# Altium PCB ServoBoard.PcbDoc
Units mm, origin at the board's own origin, x right, y up, seen from the top; angles counter-clockwise.
Board outline 59 x 59 mm, 2 copper layers (Top Layer, Bottom Layer), stack 1.571 mm thick; 29 components, 40 nets, 144 pads, 14 vias.
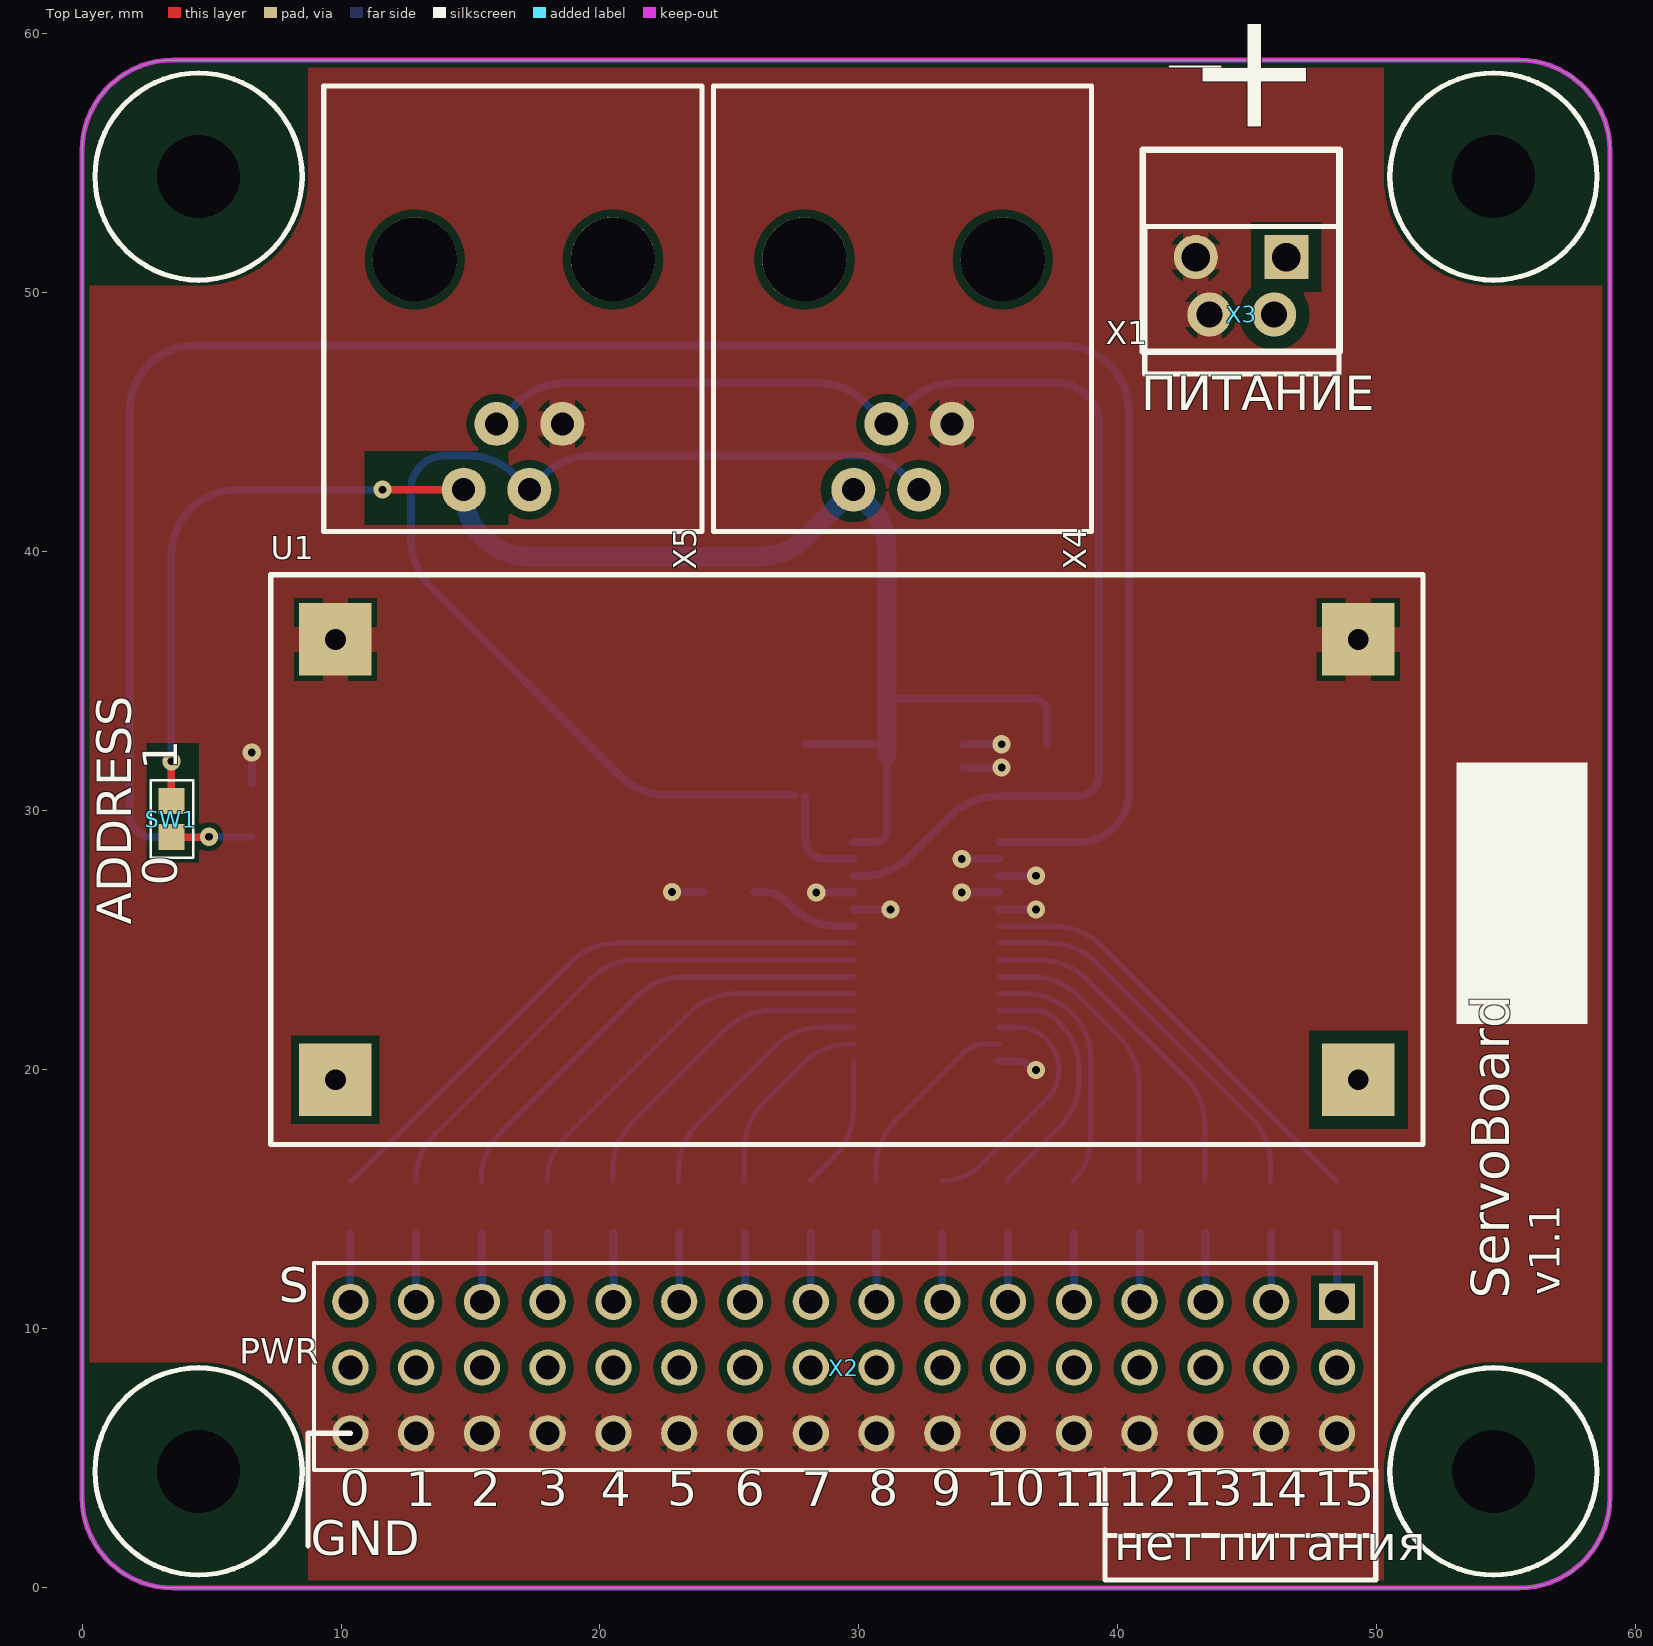
[diagram p0: Top Layer view]
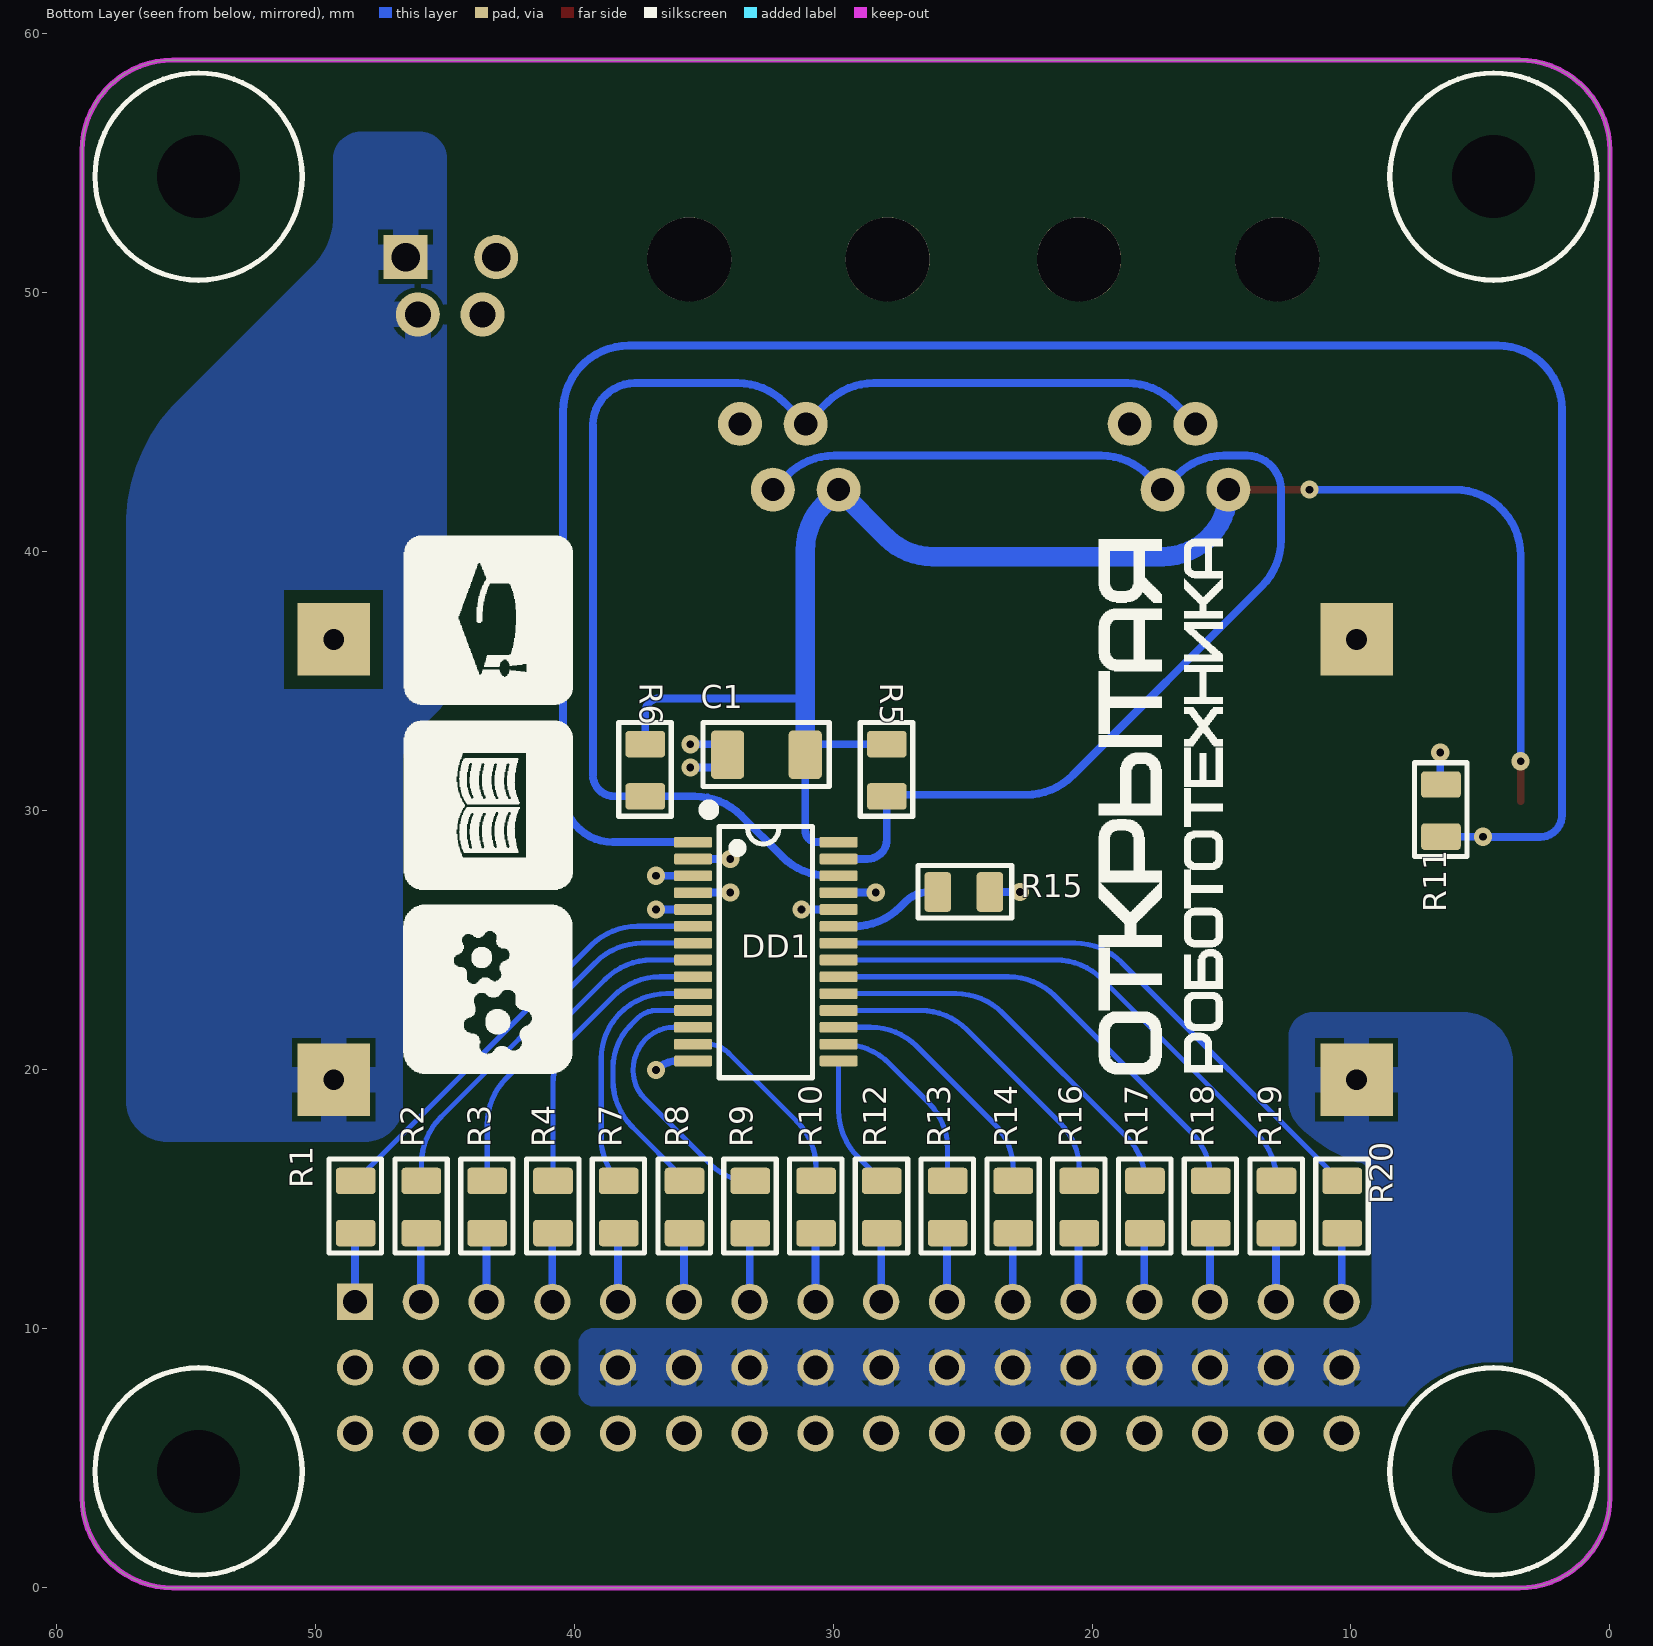
[diagram p1: Bottom Layer view, seen from below]

## Layer stack, top to bottom
Top Solder: solder mask 0.0102, Solder Resist, Dk 3.5
Top Layer: signal copper 0.0356
Dielectric 1: dielectric 1.5, FR-4, Dk 4.8
Bottom Layer: signal copper 0.0356
Bottom Solder: solder mask 0.0102, Solder Resist, Dk 3.5

## Board outline
0,3.475 0,55.475 cw(c3.5,55.475) 3.5,58.975 55.5,58.975 cw(c55.5,55.475) 59,55.475 59,3.475 cw(c55.5,3.475) 55.5,-0.025 3.5,-0.025 cw(c3.5,3.475)

## Design rules (kind name [scope] priority, off if disabled: settings)
Clearance Clearance_POWER_12B [InNet('12B') vs InNet('GND')] p1: gap=0.5 except(0.2: Arc-SMDPad Arc-Via Track-SMDPad Track-Via SMDPad-SMDPad SMDPad-Via)
Clearance Clearance_POWER_12B_1 [InNet('NetVT1_2') vs InNet('GND')] p2: gap=0.5
Clearance Clearance_POWER_12B_2 [InNet('NetC1_1') vs InNet('GND')] p3: gap=0.5
Clearance Clearance_POWER_5B [InNet('5B') vs InNet('GND')] p4: gap=0.3 except(0.2: SMDPad-SMDPad; 0.4: Arc-THPad Track-THPad THPad-THPad THPad-Fill THPad-Poly THPad-Region; 0.5: Arc-Fill Arc-Poly Arc-Region Track-Fill Track-Poly Track-Region)
Clearance [All] p5: gap=0.2 except(0.3: Arc-THPad Track-THPad THPad-THPad THPad-Via THPad-Fill THPad-Poly THPad-Region THPad-Text)
ComponentClearance [All] p1: gap=0.05 collisioncheckmode=3 verticalgap=0.05 showdistances=FALSE
HoleSize [All] p1: absolutevalues=TRUE maxlimit=5 minlimit=0.2 maxpercent=80.000 minpercent=20.000
HoleToHoleClearance [All] p1: gap=0 allowstackedmicrovias=TRUE
MinimumSolderMaskSliver [All] p1: minsoldermaskwidth=0.05
PolygonConnect NetTieDirect [InComponentClass('NetTieDirect')] p1: connectstyle=Direct reliefconductorwidth=0.254 reliefentries=4 polygonreliefangle="90 Angle" airgapwidth=0.254
PolygonConnect NetTieRelief [InComponentClass('NetTieRelief')] p2: connectstyle=Direct reliefconductorwidth=0.6 reliefentries=4 polygonreliefangle="90 Angle" airgapwidth=0.2
PolygonConnect PolygonConnect_GND_2 [HasFootprint('XT60-M') And OnLayer('Bottom Layer') vs InNet('GND')] p3: connectstyle=Relief reliefconductorwidth=4 reliefentries=4 polygonreliefangle="90 Angle" airgapwidth=0.254
PolygonConnect PolygonConnect_GND [InNet('GND')] p4: connectstyle=Relief reliefconductorwidth=1 reliefentries=4 polygonreliefangle="90 Angle" airgapwidth=0.2
PolygonConnect PolygonConnect_GND_12B [InNet('NetVT1_2')] p5: connectstyle=Relief reliefconductorwidth=4 reliefentries=4 polygonreliefangle="90 Angle" airgapwidth=0.2
PolygonConnect PolygonConnect_GND_12B_3 [InNet('6B_Servo')] p6: connectstyle=Relief reliefconductorwidth=1 reliefentries=4 polygonreliefangle="90 Angle" airgapwidth=0.2
PolygonConnect PolygonConnect_GND_12B_2 [InNet('NetC1_1')] p7: connectstyle=Relief reliefconductorwidth=1 reliefentries=4 polygonreliefangle="90 Angle" airgapwidth=0.2
PolygonConnect PolygonConnect_GND_12B_1 [InNet('12B')] p8: connectstyle=Relief reliefconductorwidth=1 reliefentries=4 polygonreliefangle="90 Angle" airgapwidth=0.2
PolygonConnect PolygonConnect_GND_1 [HasFootprint('TERMINAL 3 way-3.5mm') vs InNet('GND')] p9: connectstyle=Direct reliefconductorwidth=0.6 reliefentries=4 polygonreliefangle="90 Angle" airgapwidth=0.2
PolygonConnect PolygonConnect_via [IsVia] p10: connectstyle=Direct reliefconductorwidth=0.6 reliefentries=4 polygonreliefangle="90 Angle" airgapwidth=0.2
PolygonConnect [All] p11: connectstyle=Relief reliefconductorwidth=0.6 reliefentries=4 polygonreliefangle="90 Angle" airgapwidth=0.2
RoutingVias [All] p1: holewidth=0.711 width=1.27 viastyle="Through Hole" minholewidth=0.711 minwidth=1.27 maxholewidth=0.711 maxwidth=1.27
SilkToSilkClearance [All] p1: silktosilkclearance=0
SilkToSolderMaskClearance [IsPad] p1: minsilkscreentomaskgap=0 clearancetoexposedcopper=TRUE
SolderMaskExpansion [All] p1: expansion=0.05
Width [All] p1: maxlimit=3 minlimit=0.2 preferedwidth=0.3
24 further rules are at their usual default settings.

## Components (designator, comment, footprint, x,y, rotation, side; value= is the part's Value field where it differs from the comment)
C1 "Capacitor" C1206 32.545,32.175 r180 bottom
DD1 "PCA9685PW" TSSOP28 32.695,24.55 r180 bottom
R1 "Resistor_0,125Вт" R0805 48.435,14.683 r90 bottom
R2 "Resistor_0,125Вт" R0805 45.895,14.683 r90 bottom
R3 "Resistor_0,125Вт" R0805 43.355,14.683 r90 bottom
R4 "Resistor_0,125Вт" R0805 40.815,14.683 r90 bottom
R5 "Resistor_0,125Вт" R0805 27.922,31.55 r90 bottom
R6 "Resistor_0,125Вт" R0805 37.25,31.55 r90 bottom
R7 "Resistor_0,125Вт" R0805 38.275,14.683 r90 bottom
R8 "Resistor_0,125Вт" R0805 35.735,14.683 r90 bottom
R9 "Resistor_0,125Вт" R0805 33.195,14.683 r90 bottom
R10 "Resistor_0,125Вт" R0805 30.655,14.683 r90 bottom
R11 "Resistor_0,125Вт" R0805 6.525,29.992 r90 bottom
R12 "Resistor_0,125Вт" R0805 28.115,14.683 r90 bottom
R13 "Resistor_0,125Вт" R0805 25.575,14.683 r90 bottom
R14 "Resistor_0,125Вт" R0805 23.035,14.683 r90 bottom
R15 "Resistor_0,125Вт" R0805 24.95,26.85 r180 bottom
R16 "Resistor_0,125Вт" R0805 20.495,14.683 r90 bottom
R17 "Resistor_0,125Вт" R0805 17.955,14.683 r90 bottom
R18 "Resistor_0,125Вт" R0805 15.415,14.683 r90 bottom
R19 "Resistor_0,125Вт" R0805 12.875,14.683 r90 bottom
R20 "Resistor_0,125Вт" R0805 10.335,14.683 r90 bottom
SW1 "DS1040-01" 1PAD_ADR 3.448,28.968 r90 top
U1 "Module LM2596" "MODULE LM2596" 29.535,28.1 r180 top
X1 "Header_2_trm" TERMINAL-2WAY-3.5MM 44.758,51.369 r180 top
X2 "Header_48_plg" PLS-48 29.435,8.475 r270 top
X3 "" CWF-2 44.76,49.6 r90 top
X4 "Header_4_sct" RJ11_4P4C_V 31.685,49.575 r0 top
X5 "Header_4_sct" RJ11_4P4C_V 16.635,49.575 r0 top

## Footprints (in the part's own frame and the unit in brackets; to place one, negate y for a bottom-side part, rotate by r counter-clockwise, add the part's x,y. Pads: shape width x height; smd on the part's side, far side on the other; paste and mask are expansions set on the pad)
1PAD_ADR [mm] "Перемычка для выбора адреса"
  rect 1x1 smd: 1(0,0) 2(1.4,0)
  silkscreen extent -0.8,-0.85 2.2,0.8
C1206 [mm]
  rrect25% 1.28x1.87 smd: 1(-1.528,-0.024) 2(1.472,-0.024)
  silkscreen extent -2.47,-1.25 2.4,1.22, body extent -1.6,-0.85 1.6,0.85, height 1.47
CWF-2 [mm]
  round 1.7 hole 1: 1(-0.45,-1.275) 2(-0.45,1.225)
  silkscreen extent -2.75,-3.78 2.95,3.73, body extent -2.7,-3.73 3,3.78, height 7.7
"MODULE LM2596" [mm]
  rect 2.8x2.8 hole 0.8: 1(-19.75,8.5) 2(-19.75,-8.5) 3(19.75,8.5) 4(19.75,-8.5)
  silkscreen extent -22.25,-11 22.25,11, body extent -21.75,-10.5 21.75,10.5, height 14.71
PLS-48 [mm]
  rect 1.4x1.4 hole 0.92: 1(-2.55,19.025)
  round 1.4 hole 0.92: 2(-0.01,19.025) 3(2.53,19.025) 4(-2.55,16.485) 5(-0.01,16.485) 6(2.53,16.485) 7(-2.55,13.945) 8(-0.01,13.945) 9(2.53,13.945) 11(-0.01,11.405) 12(2.53,11.405) 13(-2.55,8.865) 14(-0.01,8.865) 15(2.53,8.865) 16(-2.55,6.325) 17(-0.01,6.325) 18(2.53,6.325) 19(-2.55,3.785) 20(-0.01,3.785) 21(2.53,3.785) 22(-2.55,1.245) 23(-0.01,1.245) 24(2.53,1.245) 28(-2.55,-3.835) 29(-0.01,-3.835) 30(2.53,-3.835) 31(-2.55,-6.375) 32(-0.01,-6.375) 33(2.53,-6.375) 34(-2.55,-8.915) 35(-0.01,-8.915) 36(2.53,-8.915) 37(-2.55,-11.455) 38(-0.01,-11.455) 39(2.53,-11.455) 40(-2.55,-13.995) 41(-0.01,-13.995) 42(2.53,-13.995) 46(-2.55,-19.075) 47(-0.01,-19.075) 48(2.53,-19.075)
  round 1.4 hole 0.92 mask+0.102: 10(-2.55,11.405) 25(-2.55,-1.295) 26(-0.01,-1.295) 27(2.53,-1.295) 43(-2.55,-16.535) 44(-0.01,-16.535) 45(2.53,-16.535)
  silkscreen extent -4.05,-20.48 3.95,20.52, body extent -3.86,-20.33 3.76,20.31, height 8.54
R0805 [mm] "Chip Resistor, 2-Leads, Body 2,10x1,30mm, IPC Medium Density"
  rrect25% 1.02x1.53 smd paste-5: 1(-1.008,0) 2(1.008,0)
  silkscreen extent -1.78,-1 1.85,1.02, body extent -1.1,-0.7 1.1,0.7, height 0.55
RJ11_4P4C_V [mm]
  round 1.7 hole 0.89: 1(-0.63,-4.65) 2(-1.9,-7.19) 3(1.91,-4.65) 4(0.64,-7.19)
  round 3.25 hole 3.25 unplated: ""(-3.79,1.7) ""(3.865,1.7)
  silkscreen extent -7.3,-8.8 7.3,8.4, body extent -6.96,-8.43 7.01,8.07, height 15.94
TERMINAL-2WAY-3.5MM [mm]
  rect 1.7x1.7 hole 1.1: 1(-1.75,0)
  round 1.7 hole 1.1: 2(1.75,0)
  silkscreen extent -3.8,-4.15 3.8,3.65, body extent -3.56,-3.89 3.56,3.4, height 8.51
TSSOP28 [mm]
  rrect25% 1.47x0.41 smd: 1(-2.71,4.225) 2(-2.71,3.575) 3(-2.71,2.925) 4(-2.71,2.275) 5(-2.71,1.625) 6(-2.71,0.975) 7(-2.71,0.325) 8(-2.71,-0.325) 9(-2.71,-0.975) 10(-2.71,-1.625) 11(-2.71,-2.275) 12(-2.71,-2.925) 13(-2.71,-3.575) 14(-2.71,-4.225) 15(2.91,-4.225) 16(2.91,-3.575) 17(2.91,-2.925) 18(2.91,-2.275) 19(2.91,-1.625) 20(2.91,-0.975) 21(2.91,-0.325) 22(2.91,0.325) 23(2.91,0.975) 24(2.91,1.625) 25(2.91,2.275) 26(2.91,2.925) 27(2.91,3.575) 28(2.91,4.225)
  silkscreen extent -2.3,-4.87 1.9,5.67, body extent -3.1,-4.85 3.3,4.85, height 1.2

## Part data
C1: library part cap186, "Конденсатор"
DD1: library part driver0, "Драйвер светодиода, 16 выходов"
R1 R2 R3 R4 R7 R8 R9 R10 R12 R13 R14 R16 R17 R18 R19 R20: library part res41, "Резистор"
R5 R6: library part res125, "Резистор"
R11 R15: library part res97, "Резистор"
SW1: library part btn7, "DIP переключатель"
U1: library part module0, "Low-Dropout Regulator for 5-V to 3.3-V Conversion"
X1: library part connect34, "Разъем - 2 конт. клеммник"
X2: library part connect28, "Разъем - 5 конт. вилка"
X3: library part connect15, "Разъем - 2 конт. вилка"
X4 X5: library part connect73, "Разъем - 4 конт. розетка"

## Free pads (board coordinates)
  round 0 hole 3.2 unplated: ""(4.5,4.475) ""(4.5,54.475) ""(54.5,4.475) ""(54.5,54.475)

## Via types
v1: diameter 0.7, hole 0.3, Top Layer to Bottom Layer, tented both sides, 14 vias

## Nets (pads, with @x,y where several pads share a name; then routed paths per layer and width w, separated by ;. In a path a pad name is that pad's centre, name@x,y a point inside that pad or via, vN(x,y) a via of type N, cw(c..) or ccw(c..) an arc to the next point about the centre after c; other vN are vias at no path point)
5B: C1.2 DD1.28 R5.2 R6.2 SW1.2 X4.2 X5.2 | length 65.2
  Top Layer w0.3: SW1.2 v1(3.448,31.9) ; v1(11.6,42.385) X5.2
  Bottom Layer w0.3: v1(3.448,31.9) 3.448,39.845 cw(c5.988,39.845) 5.988,42.385 v1(11.6,42.385) ; R5.2 30.666,32.557 cw(c30.666,32.151) C1.2 31.073,29.225 cw(c30.623,29.225) 30.623,28.775 DD1.28 ; 31.073,34.275 cw(c31.123,34.275) 31.123,34.325 36.725,34.325 cw(c36.725,33.8) 37.25,33.8 R6.2
  Bottom Layer w0.75: X5.2 14.735,42.34 ccw(c17.275,42.34) 17.275,39.8 26.148,39.8 ccw(c26.148,42.34) 27.944,40.544 X4.2 ; X4.2@30.329,41.841 cw(c28.533,40.045) 31.073,40.045 31.073,34.275 C1.2
6B_Servo: U1.3 X2.14 X2.17 X2.20 X2.23 X2.26 X2.29 X2.32 X2.35 X2.38 X2.41 X2.44 X2.47
12B: U1.1 X1.1 X3.1
GND: C1.1 DD1.2 DD1.3 DD1.4 DD1.5 DD1.14 DD1.24 DD1.25 R11.2 R15.2 U1.2 U1.4 X1.2 X2.3 X2.6 X2.9 X2.12 X2.15 X2.18 X2.21 X2.24 X2.27 X2.30 X2.33 X2.36 X2.39 X2.42 X2.45 X2.48 X3.2 X4.3 X5.3 | length 15.5
  Bottom Layer w0.3: R11.2@6.55,31.025 v1(6.55,32.232) ; v1(22.785,26.85) R15.2@24.017,26.85 ; v1(28.35,26.825) DD1.25 ; DD1.24 v1(31.22,26.175) ; v1(33.97,26.825) DD1.4 ; v1(33.97,28.125) DD1.2 ; C1.1@34.035,31.656 v1(35.51,31.656) ; C1.1@34.035,32.556 v1(35.51,32.556) ; DD1.14 35.996,20.325 cw(c35.996,19.131) v1(36.84,19.975) ; DD1.5 v1(36.84,26.175) ; DD1.3 v1(36.84,27.475)
NetDD1_1: DD1.1 R11.1 SW1.1 | length 84.5
  Top Layer w0.3: SW1.1 v1@4.883,28.968
  Bottom Layer w0.3: R11.1 v1(4.9,28.985) 4.9,28.975 2.7,28.975 cw(c2.7,29.825) 1.85,29.825 1.85,45.475 cw(c4.325,45.475) 4.325,47.95 37.885,47.95 cw(c37.885,45.41) 40.425,45.41 40.425,30.7 cw(c38.5,30.7) 38.5,28.775 DD1.1
NetDD1_23: DD1.23 R15.1 | length 4.2
  Bottom Layer w0.3: R15.1 26.295,26.85 cw(c26.295,25.57) 27.2,26.475 27.406,26.269 ccw(c29.202,28.065) 29.202,25.525 DD1.23
NetDD1_26: DD1.26 R6.1 X4.1 X5.1 | length 50.3
  Bottom Layer w0.3: X5.1 16.836,45.756 cw(c18.632,43.96) 18.632,46.5 28.428,46.5 cw(c28.428,43.96) 30.224,45.756 X4.1 31.886,45.756 cw(c33.682,43.96) 33.682,46.5 37.65,46.5 cw(c37.65,44.875) 39.275,44.875 39.275,31.375 cw(c38.443,31.375) 38.443,30.543 R6.1 35.345,30.543 ccw(c35.345,28.003) 33.549,29.799 31.969,28.219 cw(c30.173,30.015) 30.173,27.475 DD1.26
NetDD1_27: DD1.27 R5.1 X4.4 X5.4 | length 46.8
  Bottom Layer w0.3: R5.1@27.487,30.603 22.55,30.603 cw(c22.55,33.143) 20.754,31.346 13.444,38.656 cw(c15.24,40.452) 12.7,40.452 12.7,42.385 cw(c14.015,42.385) 14.015,43.7 14.908,43.7 cw(c14.908,41.16) 16.704,42.956 X5.4 17.846,42.956 cw(c19.642,41.16) 19.642,43.7 29.958,43.7 cw(c29.958,41.16) 31.754,42.956 X4.4 ; R5.1 27.922,28.878 ccw(c28.675,28.878) 28.675,28.125 DD1.27
NetR1_1: R1.1 X2.1 | length 2.7
  Bottom Layer w0.3: X2.1 R1.1@48.46,13.676
NetR2_1: R2.1 X2.4 | length 2.7
  Bottom Layer w0.3: X2.4 R2.1@45.92,13.676
NetR3_1: R3.1 X2.7 | length 2.7
  Bottom Layer w0.3: X2.7 R3.1@43.38,13.676
NetR4_1: R4.1 X2.10 | length 2.7
  Bottom Layer w0.3: X2.10 R4.1@40.84,13.676
NetR7_1: R7.1 X2.13 | length 2.7
  Bottom Layer w0.3: X2.13 R7.1@38.3,13.676
NetR8_1: R8.1 X2.16 | length 2.7
  Bottom Layer w0.3: X2.16 R8.1@35.76,13.676
NetR9_1: R9.1 X2.19 | length 2.7
  Bottom Layer w0.3: X2.19 R9.1@33.22,13.676
NetR10_1: R10.1 X2.22 | length 2.7
  Bottom Layer w0.3: X2.22 R10.1@30.68,13.676
NetR12_1: R12.1 X2.25 | length 2.7
  Bottom Layer w0.3: X2.25 R12.1@28.14,13.676
NetR13_1: R13.1 X2.28 | length 2.7
  Bottom Layer w0.3: X2.28 R13.1@25.6,13.676
NetR14_1: R14.1 X2.31 | length 2.7
  Bottom Layer w0.3: X2.31 R14.1@23.06,13.676
NetR16_1: R16.1 X2.34 | length 2.7
  Bottom Layer w0.3: X2.34 R16.1@20.52,13.676
NetR17_1: R17.1 X2.37 | length 2.7
  Bottom Layer w0.3: X2.37 R17.1@17.98,13.676
NetR18_1: R18.1 X2.40 | length 2.7
  Bottom Layer w0.3: X2.40 R18.1@15.44,13.676
NetR19_1: R19.1 X2.43 | length 2.7
  Bottom Layer w0.3: X2.43 R19.1@12.9,13.676
NetR20_1: R20.1 X2.46 | length 2.7
  Bottom Layer w0.3: X2.46 R20.1@10.36,13.676
SERVO_0: DD1.6 R1.2 | length 17
  Bottom Layer w0.2: DD1.6 37.549,25.525 cw(c37.549,22.985) 39.345,24.781 R1.2
SERVO_1: DD1.7 R2.2 | length 15.1
  Bottom Layer w0.2: DD1.7 37.373,24.875 cw(c37.373,22.335) 39.169,24.131 45.151,18.149 cw(c43.355,16.353) 45.895,16.353 R2.2
SERVO_2: DD1.8 R3.2 | length 13.2
  Bottom Layer w0.2: DD1.8 36.998,24.225 cw(c36.998,21.685) 38.794,23.481 42.611,19.664 cw(c40.815,17.868) 43.355,17.868 R3.2
SERVO_3: DD1.9 R4.2 | length 11.3
  Bottom Layer w0.2: DD1.9 36.673,23.575 cw(c36.673,21.035) 38.469,22.831 40.071,21.229 cw(c38.275,19.433) 40.815,19.433 R4.2
SERVO_4: DD1.10 R7.2 | length 9.9
  Bottom Layer w0.2: DD1.10 36.423,22.925 cw(c36.423,20.385) 38.219,22.181 cw(c36.455,20.416) 38.95,20.416 38.95,17.321 cw(c36.645,17.321) R7.2
SERVO_5: DD1.11 R8.2 | length 9.8
  Bottom Layer w0.2: DD1.11 36.825,22.275 cw(c36.825,21.251) 37.549,21.975 37.811,21.713 cw(c36.149,20.05) 38.5,20.05 38.5,19.577 cw(c35.96,19.577) 37.756,17.781 35.784,15.809 ccw(c35.902,15.691) R8.2
SERVO_6: DD1.12 R9.2 | length 9.8
  Bottom Layer w0.2: R9.2 ccw(c33.195,17.854) 34.724,16.324 37.27,18.87 ccw(c36.173,19.968) 37.725,19.968 ccw(c36.018,19.968) 37.225,21.175 ccw(c36.139,20.089) 36.139,21.625 DD1.12
SERVO_7: DD1.13 R10.2 | length 7.7
  Bottom Layer w0.2: R10.2 30.655,16.203 cw(c33.195,16.203) 31.399,17.999 34.025,20.625 cw(c34.869,19.781) 34.869,20.975 DD1.13
SERVO_8: DD1.15 R12.2 | length 5.2
  Bottom Layer w0.2: R12.2 29.041,16.617 ccw(c27.245,18.413) 29.785,18.413 DD1.15
SERVO_9: DD1.16 R13.2 | length 7.5
  Bottom Layer w0.2: R13.2 25.575,16.923 cw(c28.115,16.923) 26.319,18.719 27.831,20.231 cw(c29.627,18.435) 29.627,20.975 DD1.16
SERVO_10: DD1.17 R14.2 | length 9.8
  Bottom Layer w0.2: R14.2 23.035,16.108 cw(c25.575,16.108) 23.779,17.904 26.756,20.881 cw(c28.552,19.085) 28.552,21.625 DD1.17
SERVO_11: DD1.18 R16.2 | length 12.7
  Bottom Layer w0.2: R16.2 20.495,16.143 cw(c23.035,16.143) 21.239,17.939 24.831,21.531 cw(c26.627,19.735) 26.627,22.275 DD1.18
SERVO_12: DD1.19 R17.2 | length 15.2
  Bottom Layer w0.2: R17.2 cw(c20.343,15.691) 18.654,17.379 23.456,22.181 cw(c25.252,20.385) 25.252,22.925 DD1.19
SERVO_13: DD1.20 R18.2 | length 18.1
  Bottom Layer w0.2: R18.2 15.415,15.763 cw(c17.955,15.763) 16.159,17.559 21.431,22.831 cw(c23.227,21.035) 23.227,23.575 DD1.20
SERVO_14: DD1.21 R19.2 | length 20.8
  Bottom Layer w0.2: R19.2 12.875,15.698 cw(c15.415,15.698) 13.619,17.494 19.606,23.481 cw(c21.402,21.685) 21.402,24.225 DD1.21
SERVO_15: DD1.22 R20.2 | length 23.1
  Bottom Layer w0.2: R20.2 ccw(c10.335,15.886) 10.473,15.748 18.856,24.131 cw(c20.652,22.335) 20.652,24.875 DD1.22
pads on no net: X2.2 X2.5 X2.8 X2.11 X4. X5.

## Polygon pours and split planes (outlines as drawn)
GND on Top Layer "Top Signal Layer-No Net" (solid, pour order 2): 0,0 59,0 59,58.975 0,58.975
12B on Bottom Layer "Top Signal Layer-No Net" (solid, pour order 4): 49.3,55.15 49.3,52.93 ccw(c51.969,52.93) 50.082,51.043 55.285,45.84 cw(c50.421,40.975) 57.3,40.975 57.3,18.8 cw(c55.7,18.8) 55.7,17.2 48.082,17.2 cw(c48.082,18.674) 46.608,18.674 46.608,31.954 ccw(c45.31,31.954) 46.228,32.872 45.252,33.848 cw(c46.041,34.637) 44.925,34.637 44.925,55.175 cw(c45.95,55.175) 45.95,56.2 48.25,56.2 cw(c48.25,55.15)
6B_Servo on Bottom Layer "Top Signal Layer-No Net" (solid, pour order 8): 12.396,21.304 12.396,19.396 12.396,18.765 cw(c11.071,18.765) 12.007,17.828 cw(c7.713,22.122) 10.028,16.508 9.644,16.349 ccw(c9.917,15.686) 9.2,15.686 9.2,11.05 ccw(c10.25,11.05) 10.25,10 39.25,10 cw(c39.25,9.435) 39.815,9.435 39.815,7.565 cw(c39.25,7.565) 39.25,7 3.75,7 3.75,20.276 cw(c5.674,20.276) 5.674,22.2 11.5,22.2 cw(c11.5,21.304)

## Keep-outs
Keep-Out Layer:
  the board outline again, w0.2

## Other copper
Top Layer:
  pour cut-out: 2.5,28 4.5,28 4.5,32.59 2.5,32.59
  pour cut-out: 16.45,43.875 16.45,41.025 10.91,41.025 10.91,43.875
  pour cut-out: 59,50.263 59,55.198 59,58.9 58.527,58.9 50.27,58.9 50.27,54.405 ccw(c54.412,54.405) 54.412,50.263
  pour cut-out: 59,8.687 59,3.752 59,0.05 58.527,0.05 50.27,0.05 50.27,4.545 cw(c54.412,4.545) 54.412,8.687
  pour cut-out: 0,8.687 0,3.752 0,0.05 0.473,0.05 8.73,0.05 8.73,4.545 ccw(c4.588,4.545) 4.588,8.687
  pour cut-out: 0,50.263 0,55.198 0,58.9 0.473,58.9 8.73,58.9 8.73,54.405 cw(c4.588,54.405) 4.588,50.263
Bottom Layer:
  pour cut-out: 59,50.263 59,55.198 59,58.9 58.527,58.9 50.27,58.9 50.27,54.405 ccw(c54.412,54.405) 54.412,50.263
  pour cut-out: 59,8.687 59,3.752 59,0.05 58.527,0.05 50.27,0.05 50.27,4.545 cw(c54.412,4.545) 54.412,8.687
  pour cut-out: 0,8.687 0,3.752 0,0.05 0.473,0.05 8.73,0.05 8.73,4.545 ccw(c4.588,4.545) 4.588,8.687
  pour cut-out: 0,50.263 0,55.198 0,58.9 0.473,58.9 8.73,58.9 8.73,54.405 cw(c4.588,54.405) 4.588,50.263

## Silkscreen, mask and mechanical layers (free items; w line width, h text height)
Top Overlay:
  circle w0.2: c54.5,54.475 r4
  circle w0.2: c54.5,4.475 r4
  circle w0.2: c4.5,54.475 r4
  circle w0.2: c4.5,4.475 r4
  region: 58.125,21.759 58.125,31.858 53.075,31.858 53.075,21.759
  lines w0.2: 8.73,1.6 8.73,5.945 10.36,5.945 ; 39.5,2 49.96,2 ; 39.5,4.525 39.5,0.281 49.96,0.281 49.96,4.525
  text "+" at 48.8,55.733 h8 r90
  text "-" at 41.6,54.964 h10
  text "ПИТАНИЕ" at 40.9,45 h2.3
  text "1" at 4.125,31.55 h2.3 r90
  text "0" at 4.125,27.1 h2.3 r90
  text "ADDRESS" at 2.35,25.575 h2.3 r90
  text "v1.1" at 57.45,11.275 h2 r90
  text "ServoBoard" at 55.6,11.146 h2.5 r90
  text "S" at 7.6,10.555 h2.3
  text "PWR" at 6.07,8.3 h1.7
  text "0" at 9.945,2.7 h2.3
  text "3" at 17.6,2.7 h2.3
  text "5" at 22.6,2.7 h2.3
  text "6" at 25.2,2.7 h2.3
  text "8" at 30.36,2.7 h2.3
  text "9" at 32.8,2.7 h2.3
  text "10" at 34.886,2.7 h2.3
  text "13" at 42.507,2.7 h2.3
  text "15" at 47.581,2.7 h2.3
  text "1" at 12.5,2.677 h2.3
  text "2" at 15,2.677 h2.3
  text "4" at 20.02,2.677 h2.3
  text "7" at 27.8,2.677 h2.3
  text "11" at 37.5,2.677 h2.3
  text "12" at 40,2.677 h2.3
  text "14" at 45,2.677 h2.3
  text "GND" at 8.835,0.8 h2.3
  text "нет питания" at 39.866,0.6 h2.3
Bottom Overlay:
  drawing of 4029 lines, arcs and shapes, not listed
Mechanical 9:
  lines w0.3: 5.75,31 5.75,32.232